# EAGLE board semaforo (EAGLE 6.5.0)
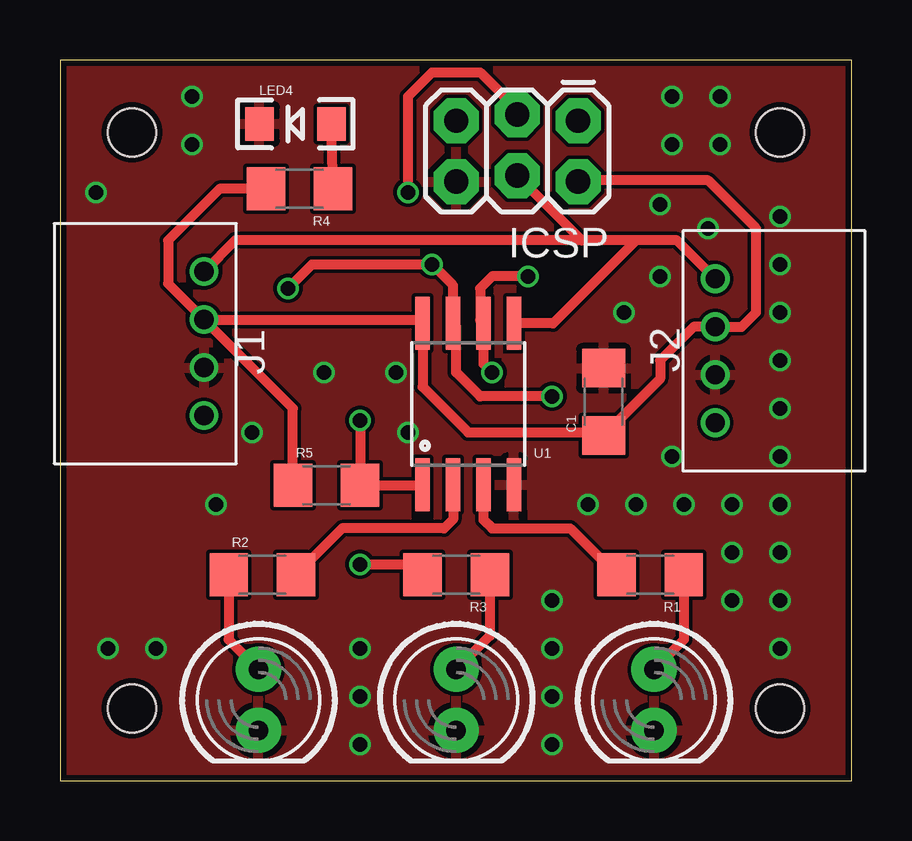
[diagram p0: board, top side]
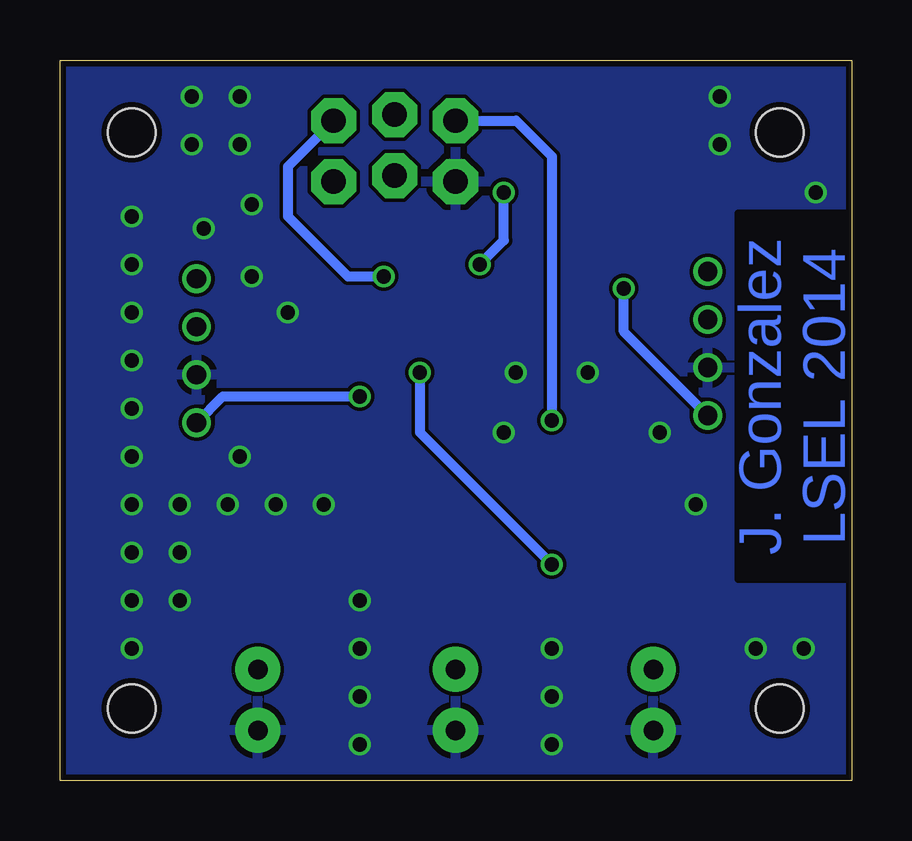
[diagram p1: board, bottom side, seen from below]

Size 32.99 x 30.04 mm. Coordinates in mm from the lower left corner, seen from the top.
Outline: 0,0 32.99,0 32.99,30.04 0,30.04 0,0
Copper layers (1*16): Top 0.035mm / dielectric 0.2mm / Bottom 0.035mm
Design rules "SeeedStudio_DRU_no_angle_20130527 *": minimum track width 6mil, minimum drill 12mil, track to track 6mil, track to pad 6mil, pad to pad 6mil, via to via 6mil, smd to smd 0mil, copper to edge 10mil, drill to drill 10mil, minimum pad ring 6mil, minimum via ring 6mil, stop-mask expansion 2mil, vias tented up to drill 25mil, thermal gap 10mil
Holes 2 mm at 3,27.02 30,27.02 30,3.02 3,3.02

## Footprints (pad centres in the part's own frame; a part is rotated, then mirrored left to right if it is on the bottom)
1206 = smd 1.6 x 1.8: 1 -1.4,0; 2 1.4,0
2X3_LOCK = drill 1.016 pad 1.88 octagon: 1 0,0; 2 0,2.54; 3 2.54,-0.254; 4 2.54,2.286; 5 5.08,0; 6 5.08,2.54
JST-S4B-PH = drill 0.8: P$1 -3,0; P$2 -1,0; P$3 1,0; P$4 3,0
LED5MM = drill 0.813 pad 1.88: A -1.27,0; K 1.27,0
LED-1206 = smd 1.2 x 1.4: A -1.5,0; C 1.5,0
SO08-EIAJ = smd 0.61 x 2.21: 1 -1.905,-3.378; 2 -0.635,-3.378; 3 0.635,-3.378; 4 1.905,-3.378; 5 1.905,3.353; 6 0.635,3.353; 7 -0.635,3.353; 8 -1.905,3.353

## Placement (x,y rotation side)
C1  100n  [1206]  22.65,15.8 90 top
ICSP  AVR_SPI_PRG_62X3_LOCK  [2X3_LOCK]  21.59,27.51 180 top
J1  JST-S4B-PH  [JST-S4B-PH]  6,18.22 90 top
J2  JST-S4B-PH  [JST-S4B-PH]  27.3,17.92 270 top
LED1  [LED5MM]  24.75,3.38 270 top
LED2  [LED5MM]  8.27,3.38 270 top
LED3  [LED5MM]  16.51,3.38 270 top
LED4  [LED-1206]  9.81,27.37 180 top
R1  100  [1206]  24.59,8.59 180 top
R2  100  [1206]  8.43,8.59 0 top
R3  100  [1206]  16.51,8.59 180 top
R4  1k  [1206]  9.97,24.67 180 top
R5  1k  [1206]  11.1,12.32 0 top
U1  Tiny45-20-SMT  [SO08-EIAJ]  17.01,15.71 0 top

## Library data of the parts
C1 = SparkFun-Capacitors
ICSP = SparkFun-Connectors
J1 J2 = jst-ph
LED1-LED4 = SparkFun-LED
R1-R5 = SparkFun-Passives
U1 = SparkFun-DigitalIC; PROD_ID: IC-08922

## Nets
GND: C1.2 ICSP.6 J1.P$2 J2.P$3 LED1.K LED2.K LED3.K LED4.C U1.4
MISO: ICSP.1 R3.2 U1.6
MOSI: ICSP.4 J1.P$4 J2.P$1 U1.5
N$5: R1.2 U1.3
N$6: R2.2 U1.2
N$8: LED4.A R4.1
N$10: LED1.A R1.1
N$12: LED2.A R2.1
N$13: LED3.A R3.1
RESET: ICSP.5 R5.2 U1.1
SCK: ICSP.3 J1.P$1 J2.P$4 U1.7
VCC: C1.1 ICSP.2 J1.P$3 J2.P$2 R4.2 R5.1 U1.8

## Tracks (layer width: path | path; a pad name or v marks a point on that pad's centre or on a via)
GND  (via drill 0.6 pad 0.61)
  other vias: 30,5.52 30,7.52 30,9.52 30,11.52 30,13.52 30,15.52 30,17.52 28,11.52 28,9.52 28,7.52 30,19.52 30,21.52 30,23.52 25,21.02 23.5,19.52 27,23.02 27.5,26.52 25.5,26.52 5.5,28.52 20.5,5.52 20.5,7.52 26,11.52 24,11.52 22,11.52 25.5,13.52 20.5,3.52 20.5,1.52 12.5,3.52 12.5,5.52 12.5,1.52 4,5.52 6.5,11.52 11,17.02 14.5,14.52 14,17.02 1.5,24.52 8,14.52 25.5,28.52 27.5,28.52 2,5.52 25,24.02 5.5,26.52
  pour Top: 0,30.02 33,30.02 33,0.02 0,0.02
  pour Bottom: 0,30.02 33,30.02 33,0.02 0,0.02
MISO  (via drill 0.6 pad 0.61)
  Top 0.406: v19.5,21.02 18,21.02 17.5,20.52 17.5,19.21 U1.6 17.64,17.38 v18,17.02 | v12.5,9.02 14.68,9.02 R3.2
  Bottom 0.406: ICSP.1 23.5,25.6 23.5,23.52 21,21.02 v19.5,21.02 | v18,17.02 18,14.52 v12.5,9.02
MOSI
  Top 0.406: J2.P$1 25.7,22.52 24,22.52 | 21.75,22.52 7.3,22.52 J1.P$4 | 24,22.52 21.75,22.52 | 21.75,22.52 ICSP.4 | 24,22.52 20.54,19.06 U1.5
N$5
  Top 0.406: U1.3 17.64,10.88 18,10.52 21.26,10.52 R1.2
N$6
  Top 0.406: U1.2 16.38,10.9 16,10.52 11.76,10.52 R2.2
N$8
  Top 0.406: R4.1 LED4.A
N$10
  Top 0.406: R1.1 25.99,5.89 LED1.A
N$12
  Top 0.406: R2.1 7.03,5.89 LED2.A
N$13
  Top 0.406: R3.1 17.91,6.05 LED3.A
RESET  (via drill 0.6 pad 0.61)
  Top 0.406: U1.1 15.09,12.32 R5.2 v12.5,15.02
  Bottom 0.406: ICSP.5 13.98,27.51 12.5,26.02 v12.5,15.02
SCK  (via drill 0.6 pad 0.61)
  Top 0.406: v14.5,24.52 14.5,28.52 15.5,29.52 17.5,29.52 19.05,27.97 ICSP.3 | v9.5,20.52 10.5,21.52 v15.5,21.52 16.38,20.65 U1.7 16.5,18.94 16.5,17.02 17.5,16.02 v20.5,16.02
  Bottom 0.406: v15.5,21.52 14.5,22.52 v14.5,24.52 | J1.P$1 9.5,18.72 v9.5,20.52 | J2.P$4 26.2,16.02 v20.5,16.02
VCC
  Top 0.406: J1.P$3 14.95,19.22 U1.8 15.11,16.42 17,14.52 22.52,14.52 C1.1 25,16.75 25,17.52 26.4,18.92 J2.P$2 28.4,18.92 29,19.52 29,23.02 27,25.02 21.64,25.02 ICSP.2 | R4.2 6.65,24.67 4.5,22.52 4.5,20.72 J1.P$3 | J1.P$3 9.7,15.52 R5.1

## Text on the board
Bottom: J. Gonzalez / LSEL 2014